# EAGLE board discoball-v1 (EAGLE 9.4.2)
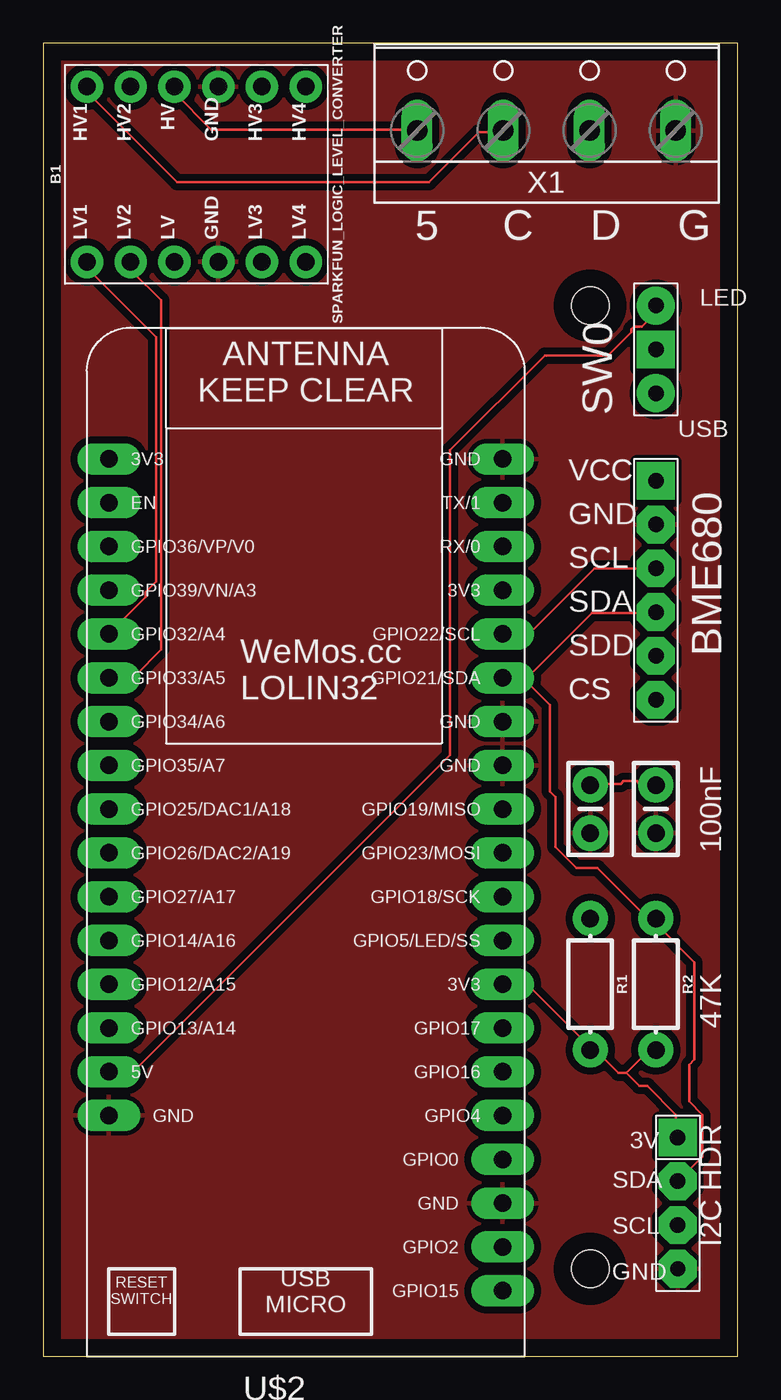
[diagram p0: board, top side]
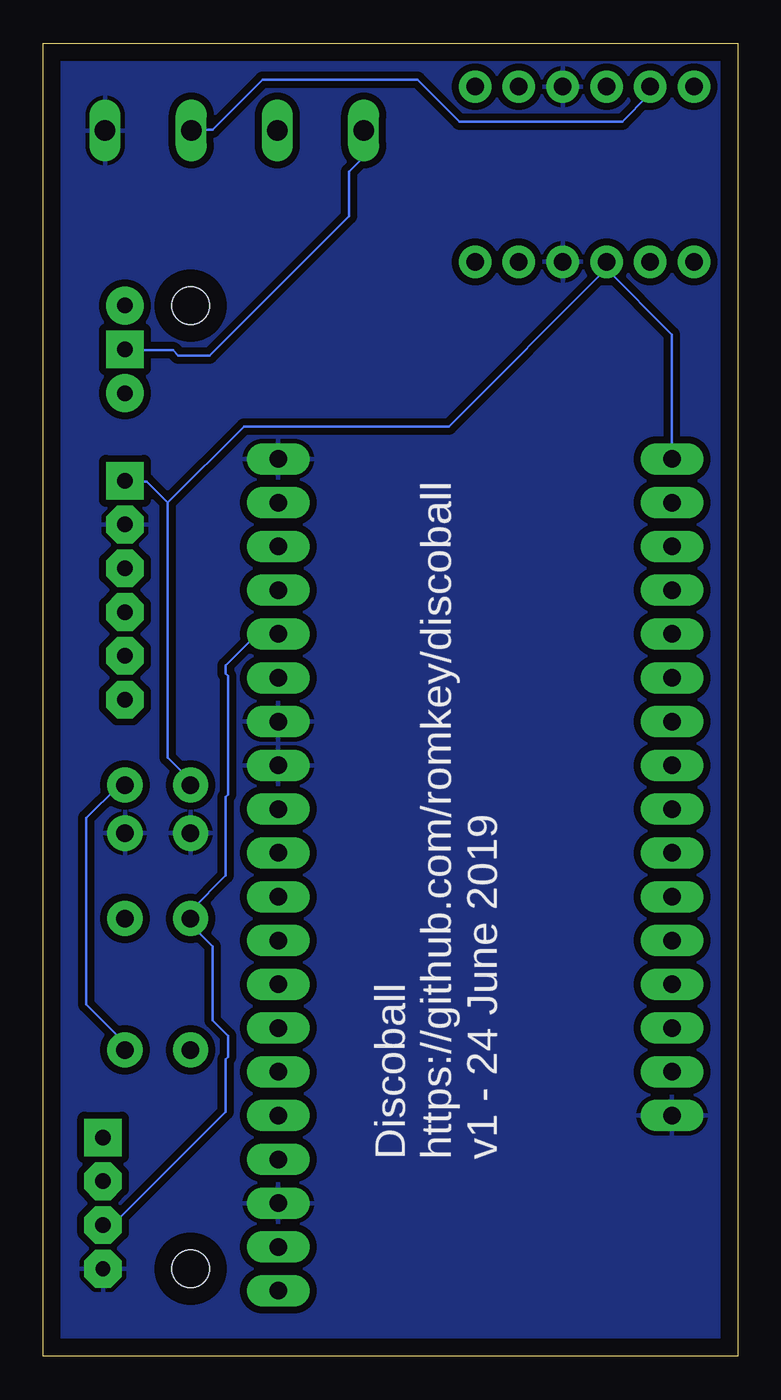
[diagram p1: board, bottom side, seen from below]

Size 40.31 x 76.19 mm. Coordinates in mm from the lower left corner, seen from the top.
Outline: 0,0 40.31,0 40.31,76.19 0,76.19 0,0
Copper layers (1*16): Top 0.035mm / dielectric 1.5mm / Bottom 0.035mm
Design rules "default": minimum track width 6mil, minimum drill 0.35mm, track to track 6mil, track to pad 6mil, pad to pad 6mil, via to via 6mil, smd to smd 6mil, copper to edge 40mil, drill to drill 6mil, minimum pad ring 10mil, minimum via ring 8mil, stop-mask expansion 4mil, vias tented up to drill 0mil, thermal gap 10mil
Holes 2.16 mm at 31.75,5.08 31.75,60.96

## Footprints (pad centres in the part's own frame; a part is rotated, then mirrored left to right if it is on the bottom)
SPARKFUN_LOGIC_LEVEL_CONVERTER = drill 1.016 pad 1.88: GND1 -5.08,-1.27; GND2 5.08,-1.27; HV 5.08,1.27; HV1 5.08,6.35; HV2 5.08,3.81; HV3 5.08,-3.81; HV4 5.08,-6.35; LV -5.08,1.27; LV1 -5.08,6.35; LV2 -5.08,3.81; LV3 -5.08,-3.81; LV4 -5.08,-6.35
CAP-PTH-SMALL-KIT = drill 1.016 pad 2.032: 1 -1.397,0; 2 1.397,0
AXIAL-0.3-KIT = drill 1.016 pad 2.032: P$1 -3.81,0; P$2 3.81,0
BME680BREAKOUT = drill 0.9 pad 2.184 octagon: CS 2.54,2.54; GND 2.54,12.7; SCL 2.54,10.16; SDA 2.54,7.62; SDD 2.54,5.08 | drill 0.9 pad 2.184 square: VCC 2.54,15.24
LOLIN32VAR1 = drill 1.016 pad 1.829 long: 3V3@1 -11.43,24.13; 3V3@2 11.43,16.51; 3V3@3 11.43,-6.35; 5V -11.43,-11.43; EN -11.43,21.59; GND@1 11.43,24.13; GND@2 11.43,8.89; GND@3 11.43,6.35; GND@4 11.43,-19.05; GND@5 -11.43,-13.97; GPIO0 11.43,-16.51; GPIO2 11.43,-21.59; GPIO4 11.43,-13.97; GPIO5/LED/SS 11.43,-3.81; GPIO12/A15 -11.43,-6.35; GPIO13/A14 -11.43,-8.89; GPIO14/A16 -11.43,-3.81; GPIO15 11.43,-24.13; GPIO16 11.43,-11.43; GPIO17 11.43,-8.89; GPIO18/SCK 11.43,-1.27; GPIO19/MISO 11.43,3.81; GPIO21/SDA 11.43,11.43; GPIO22/SCL 11.43,13.97; GPIO23/MOSI 11.43,1.27; GPIO25/DAC1/A18 -11.43,3.81; GPIO26/DAC2/A19 -11.43,1.27; GPIO27/A17 -11.43,-1.27; GPIO32/A4 -11.43,13.97; GPIO33/A5 -11.43,11.43; GPIO34/A6 -11.43,8.89; GPIO35/A7 -11.43,6.35; GPIO36/VP/V0 -11.43,19.05; GPIO39/VN/A3 -11.43,16.51; RX/0 11.43,19.05; TX/1 11.43,21.59
I2CHEADER = drill 0.85 pad 2.184 octagon: GND 3.81,1.27 | drill 0.9 pad 2.184 octagon: SCL 3.81,3.81; SDA 3.81,6.35 | drill 0.9 pad 2.184 square: V+ 3.81,8.89
SPDTSWITCH = drill 0.9 pad 2.184 square: COMMON 1.27,3.81 | drill 0.9 pad 2.184: SW0 1.27,6.35; SW1 1.27,1.27
W237-4 = drill 1.194 long: 1 -7.5,-1.27; 2 -2.5,-1.27; 3 2.5,-1.27; 4 7.5,-1.27

## Placement (x,y rotation side)
B1  SPARKFUN_LOGIC_LEVEL_CONVERTER  [SPARKFUN_LOGIC_LEVEL_CONVERTER]  8.89,68.58 90 top
C1  0.1uF  [CAP-PTH-SMALL-KIT]  31.75,31.75 270 top
C2  0.1uF  [CAP-PTH-SMALL-KIT]  35.56,31.75 270 top
R1  47KOHM  [AXIAL-0.3-KIT]  31.75,21.59 270 top
R2  47KOHM  [AXIAL-0.3-KIT]  35.56,21.59 270 top
U$1  BME680BREAKOUT  [BME680BREAKOUT]  33.02,35.56 0 top
U$2  WEMOSLOLIN32  [LOLIN32VAR1]  15.24,27.94 0 top
U$3  I2CHEADER  [I2CHEADER]  33.02,3.81 0 top
U$4  SPDTSWITCH  [SPDTSWITCH]  36.83,62.23 180 top
X1  [W237-4]  29.21,72.39 0 top

## Library data of the parts
B1 = SparkFun-Boards
C1 C2 = SparkFun-Capacitors; PROD_ID: CAP-08370
R1 R2 U$1-U$4 = LOLIN32
X1 = con-wago-500; OC_FARNELL: unknown; OC_NEWARK: unknown

## Nets
3.3V: B1.LV C1.1 C2.1 R1.P$2 R2.P$2 U$1.VCC U$2.3V3@1 U$2.3V3@3 U$3.V+
5V: U$2.5V U$4.SW1
GND: B1.GND1 B1.GND2 C1.2 C2.2 U$1.GND U$2.GND@1 U$2.GND@2 U$2.GND@3 U$2.GND@4 U$2.GND@5 U$3.GND X1.4
N$1: R1.P$1 U$1.SCL U$2.GPIO22/SCL U$3.SCL
N$2: R2.P$1 U$1.SDA U$2.GPIO21/SDA U$3.SDA
N$3: B1.HV2 X1.3
N$5: B1.LV1 U$2.GPIO32/A4
N$6: B1.LV2 U$2.GPIO33/A5
N$8: B1.HV1 X1.2
N$9: B1.HV U$4.COMMON X1.1

## Tracks (layer width: path | path; a pad name or v marks a point on that pad's centre or on a via)
3.3V
  Top 0.152: U$2.3V3@3 26.67,21.49 28.19,21.49 31.85,17.83 R1.P$2 31.85,17.68 32.16,17.68 33.38,16.46 33.83,16.46 | 33.83,16.46 35.05,17.68 35.51,17.68 R2.P$2 | 33.83,16.46 34.59,15.7 35.05,15.7 36.73,14.02 36.73,12.8 U$3.V+ | C1.1 31.85,33.22 33.53,33.22 33.68,33.38 34.44,33.38 34.59,33.22 35.51,33.22 C2.1
  Bottom 0.152: U$2.3V3@1 3.81,59.28 7.62,63.09 | 7.62,63.09 B1.LV 7.62,63.4 | 33.07,49.53 34.29,50.75 35.51,50.75 U$1.VCC | 33.07,49.53 33.07,34.75 31.85,33.53 31.85,33.22 C1.1 | 7.62,63.09 16.76,53.95 28.65,53.95 33.07,49.53 | R2.P$2 35.66,17.83 35.66,18.29 37.8,20.42 37.8,31.24 35.97,33.07 35.66,33.07 C2.1
5V
  Top 0.152: U$2.5V 3.81,16.61 5.33,16.61 23.62,34.9 23.62,52.58 29.11,58.06 32.77,58.06 34.14,59.44 34.14,59.59 34.29,59.74 34.75,59.74 35.51,60.5 35.51,60.96 U$4.SW1
GND
  pour Top (isolate 0.406): 0,76.2 40.64,76.2 40.64,0 0,0
  pour Bottom (isolate 0.406): 0,76.2 40.64,76.2 40.64,0 0,0
N$1
  Top 0.152: U$2.GPIO22/SCL 28.19,41.91 32,45.72 U$1.SCL
  Bottom 0.152: U$2.GPIO22/SCL 27.89,41.91 29.72,40.08 29.72,39.62 29.57,39.47 29.57,32.61 29.72,32.46 29.72,27.89 31.7,25.91 31.7,25.45 R1.P$1 31.7,25.3 31.7,24.99 30.48,23.77 30.48,19.51 29.57,18.59 29.57,17.37 29.72,17.22 29.72,14.17 36.27,7.62 U$3.SCL
N$2
  Top 0.152: 28.19,39.47 26.67,39.47 U$2.GPIO21/SDA 28.19,39.47 | 28.19,39.47 31.85,43.13 35.51,43.13 U$1.SDA | 28.19,39.47 28.19,39.01 29.41,37.8 29.41,32.77 29.72,32.46 29.72,29.57 30.94,28.35 32.16,28.35 35.05,25.45 35.51,25.45 R2.P$1 35.66,25.3 35.66,24.99 37.8,22.86 37.8,17.22 37.49,16.92 37.49,14.78 38.25,14.02 38.25,11.58 U$3.SDA
N$3
  Bottom 0.152: X1.3 31.7,71.17 30.48,71.17 27.58,74.07 18.59,74.07 16.15,71.63 6.71,71.63 5.18,73.15 5.18,73.61 B1.HV2
N$5
  Top 0.152: U$2.GPIO32/A4 5.94,44.04 5.94,44.35 6.55,44.96 6.55,59.13 2.59,63.09 2.59,63.4 B1.LV1
N$6
  Top 0.152: U$2.GPIO33/A5 3.81,39.47 5.33,39.47 6.86,41 6.86,61.27 5.18,62.94 5.18,63.4 B1.LV2
N$8
  Top 0.152: X1.2 26.67,71.02 25.3,71.02 22.4,68.12 7.77,68.12 2.59,73.3 2.59,73.61 B1.HV1
N$9
  Top 0.152: B1.HV 7.62,73.3 9.75,71.17 21.64,71.17 X1.1
  Bottom 0.152: U$4.COMMON 35.51,58.37 32.77,58.37 32.46,58.06 30.63,58.06 22.55,66.14 22.55,68.73 21.79,69.49 21.79,71.02 X1.1

## Text on the board
tPlace: 5 | C | D | G | LED | SW0 | USB | 100nF | 47K
bPlace: Discoball / https://github.com/romkey/discoball / v1 - 24 June 2019